# Altium PCB SolarPanel7Cells2.PcbDoc
Units mm, origin at the board's own origin, x right, y up, seen from the top; angles counter-clockwise.
Board outline 326 x 75 mm, 2 copper layers (Top Layer, Bottom Layer); 12 components, 12 nets, 39 pads, 11 vias.
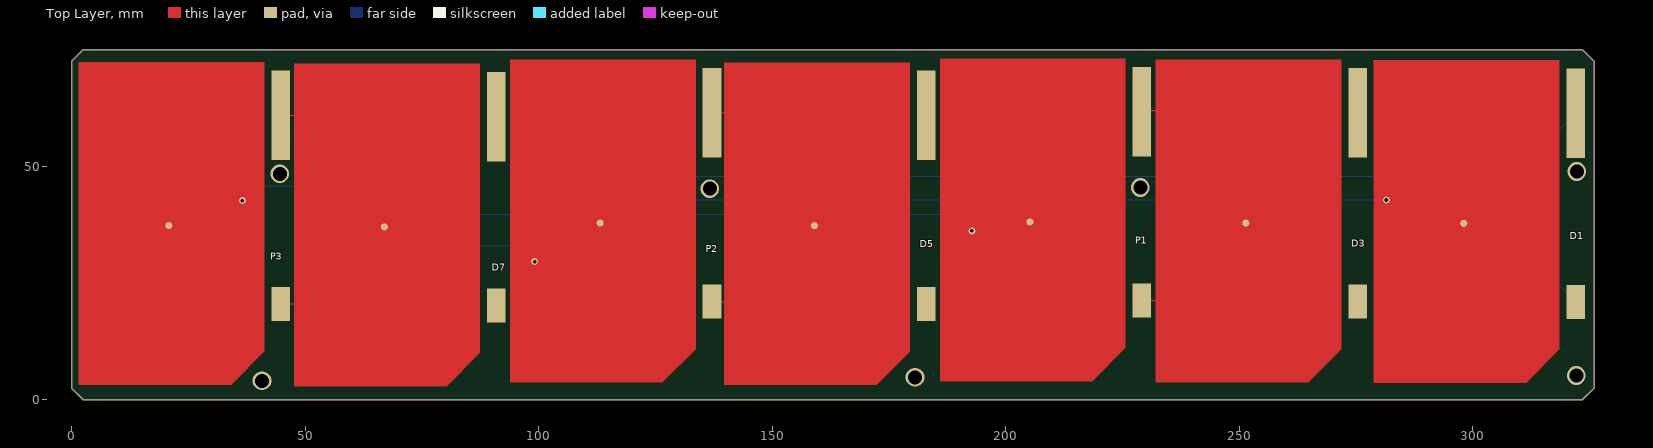
[diagram p0: Top Layer view]
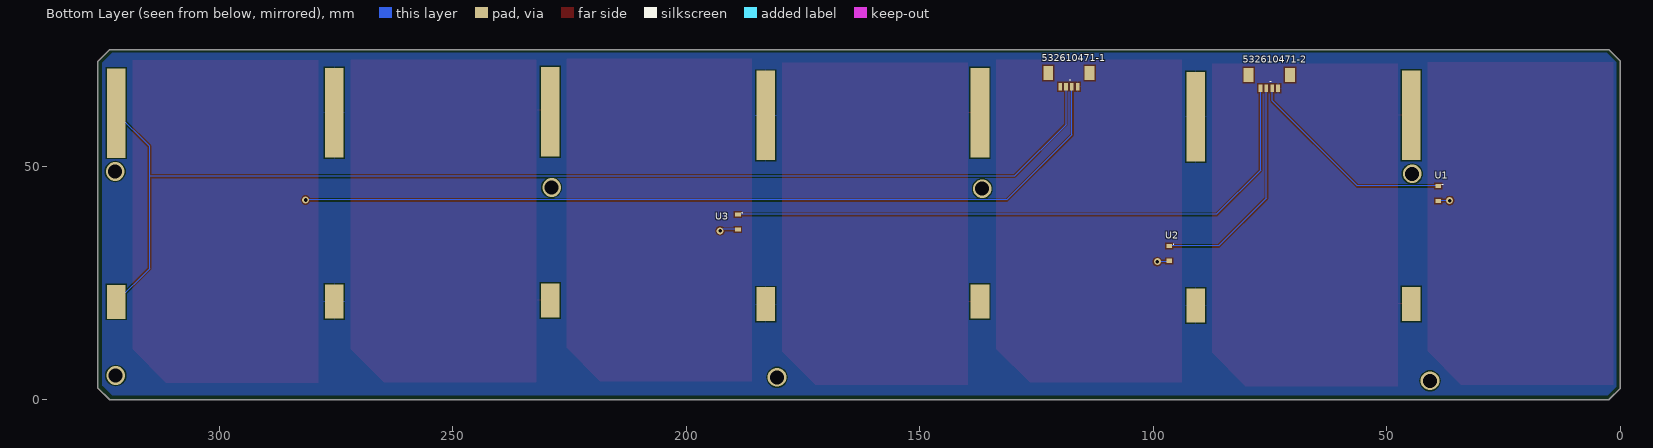
[diagram p1: Bottom Layer view, seen from below]

## Layer stack, top to bottom
Top Solder: solder mask 0.0102, Solder Resist, Dk 3.5
Top Layer: signal copper 0.0356
Dielectric 1: dielectric 0.32, FR-4, Dk 4.8
Bottom Layer: signal copper 0.0356
Bottom Solder: solder mask 0.0102, Solder Resist, Dk 3.5

## Board outline
2.5,0 0,2.5 0,72.5 2.5,75 323.5,75 326,72.5 326,2.5 323.5,0

## Design rules (kind name [scope] priority, off if disabled: settings)
Clearance [All] p1: gap=0.254 ignorepadtopadclearanceinfootprint=FALSE except(0: Arc-Hole Track-Hole SMDPad-Hole THPad-Hole Via-Hole Fill-Hole Poly-Hole Region-Hole Text-Hole)
PolygonConnect [All] p1: connectstyle=Relief reliefconductorwidth=0.254 reliefentries=4 polygonreliefangle="90 Angle" airgapwidth=0.254
RoutingVias [All] p1: holewidth=0.711 width=1.27 viastyle="Through Hole" minholewidth=0.711 minwidth=1.27 maxholewidth=0.711 maxwidth=1.27
SolderMaskExpansion [All] p1: expansion=0.102
Width [All] p1: maxlimit=0.254 minlimit=0.254 preferedwidth=0.254
30 further rules are at their usual default settings.

## Components (designator, comment, footprint, x,y, rotation, side; value= is the part's Value field where it differs from the comment)
532610471-1 "Connector 4POS Molex PicoBlade" 532610471 119.959,67.056 r270 bottom
532610471-2 "Connector 4POS Molex PicoBlade" 532610471 77.063,66.696 r270 bottom
D1 "Solar Cell" SolAeroBJT 318.5,72.771 r270 top
D3 "Solar Cell" SolAeroBJT 271.832,72.821 r270 top
D5 "Solar Cell" SolAeroBJT 179.435,72.263 r270 top
D7 "Solar Cell" SolAeroBJT 87.36,72.009 r270 top
P1 "Solar Cell" SolAeroBJT 225.604,73.075 r270 top
P2 "Solar Cell" SolAeroBJT 133.574,72.828 r270 top
P3 "Solar Cell" SolAeroBJT 41.2,72.313 r270 top
U1 "MBR0520LT1G" SOD-123 38.973,44.196 r270 bottom value=Value
U2 "MBR0520LT1G" SOD-123 96.631,31.369 r270 bottom value=Value
U3 "MBR0520LT1G" SOD-123 188.96,38.1 r270 bottom value=Value

## Footprints (in the part's own frame and the unit in brackets; to place one, negate y for a bottom-side part, rotate by r counter-clockwise, add the part's x,y. Pads: shape width x height; smd on the part's side, far side on the other; paste and mask are expansions set on the pad)
532610471 [mm] "Connector 4POS Molex PicoBlade"
  rect 1.6x0.8 smd: 1(0,3.75) 2(0,2.5) 3(0,1.25) 4(0,0)
  rect 3x2.1 smd: ""(-2.9,-2.55) ""(-2.9,6.3)
  silkscreen extent -1.52,2.07 -1.42,2.17, body extent -4.71,-3.81 1.02,7.56, height 0.6
SOD-123 [mm] "SODFL, 2-Leads, Body 1.60x3.75mm, IPC Medium Density"
  rect 0.9x1.2 smd: 1(-1.6,0) 2(1.6,0)
  silkscreen extent -2,0.85 -1.9,0.95, body extent -1.4,-0.9 1.4,0.9, height 1.35
SolAeroBJT [mm] "Solar Cell"
  round 1.524 smd: 1(34.975,-20.388)
  rect 19.16x4 all layers, no hole: 2(11.36,3.57)
  rect 7.26x4 all layers, no hole: 2(51.78,3.57)
  Top Layer region: 69.066,-7.058 69.066,-7.053 61.956,0.057 61.942,0.043 0.043,0.043 0.043,-39.639 69.066,-39.639

## Part data
532610471-1 532610471-2: library part 532610471
D1 D3 D5 D7 P1 P2 P3: library part SolAeroBJT1, "SolAero BJT Space Solar Cell"
U1 U2 U3: "Imported", C="Copyright (C) 2015 Accelerated Designs. All rights reserved", Copyright="Copyright (C) 2015 Accelerated Designs. All rights reserved", Manufacturer_Part_Number=MBR0520LT1G, RefDes=RefDes, Type=Type, Vendor="ON Semiconductor"

## Via types
v1: diameter 4, hole 3, Top Layer to Bottom Layer, 7 vias
v2: diameter 1.5, hole 0.78, Top Layer to Bottom Layer, 4 vias

## Nets (pads, with @x,y where several pads share a name; then routed paths per layer and width w, separated by ;. In a path a pad name is that pad's centre, name@x,y a point inside that pad or via, vN(x,y) a via of type N, cw(c..) or ccw(c..) an arc to the next point about the centre after c; other vN are vias at no path point)
"C1 VL": 532610471-1.3 D1.2 | length 255.3
  Bottom Layer w0.254: 532610471-1.3 118.709,58.948 129.778,47.879 314.96,47.879 ; D1.2@322.07,20.991 314.96,28.101 314.96,47.879 ; D1.2@322.07,61.411 314.96,54.301 314.96,47.879
"C1 VSC": 532610471-1.2 D1.1 | length 180.2
  Bottom Layer w0.254: 532610471-1.2 117.459,56.769 131.429,42.799 v2(281.543,42.799)
GND: 532610471-1.1 532610471-2.1 D3.2 D5.2 D7.2
"P1 PV C1": D7.1 P3.2 | length 67.4
  Top Layer w0.254: P3.2@44.77,20.533 52.349,20.533 66.972,35.155 D7.1 66.972,45.773 51.793,60.953 P3.2@44.77,60.953
"P1 PV C2": P3.1 U1.2 | length 2.4
  Bottom Layer w0.254: v2(36.56,42.672) 38.897,42.672 U1.2
"P1 VSC": 532610471-2.2 U1.1 | length 45.8
  Bottom Layer w0.254: U1.1 56.321,45.796 74.563,64.038 532610471-2.2
"P2 PV C1": D5.1 P2.2 | length 68.4
  Top Layer w0.254: P2.2@137.144,21.048 147.084,21.048 159.047,33.011 D5.1 159.047,46.423 144.002,61.468 P2.2@137.144,61.468
"P2 PV C2": P2.1 U2.2 | length 2.4
  Bottom Layer w0.254: U2.2@96.809,29.591 v2(99.171,29.591)
"P2 VSC": 532610471-2.3 U2.1 | length 48.6
  Bottom Layer w0.254: 532610471-2.3 75.813,43.17 86.014,32.969 U2.1
"P3 PV C1": D3.1 P1.2 | length 66.5
  Top Layer w0.254: P1.2@229.174,21.295 235.655,21.295 251.444,37.084 D3.1 235.061,54.229 235.061,61.976 229.435,61.976 P1.2@229.174,61.715
"P3 PV C2": P1.1 U3.2 | length 3.9
  Bottom Layer w0.254: U3.2 192.465,36.5 v2(192.77,36.195)
"P3 VSC": 532610471-2.4 U3.1 | length 133.4
  Bottom Layer w0.254: 532610471-2.4 77.063,49.159 86.522,39.7 U3.1
pads on no net: 532610471-1. 532610471-1.4 532610471-2.
copper on no net: | length 796.1
  Top Layer w0.254: 0,2.5 0,72.5 2.5,75 323.5,75 326,72.5 326,2.5 323.5,0 2.5,0 0,2.5
  other v1: 40.767,4.064 180.594,4.826 322.199,5.207 136.652,45.212 228.854,45.466 44.577,48.387 322.326,48.895

## Polygon pours and split planes (outlines as drawn)
GND on Bottom Layer "Bottom Layer-GND" (solid, pour order 6): 2.921,74.295 322.961,74.295 325.12,72.136 325.12,3.048 324.993,3.048 322.961,1.016 2.667,1.016 0.889,2.794 0.889,72.263